# Altium PCB Modulo Servo.PcbDoc
Units mm, origin at the board's own origin, x right, y up, seen from the top; angles counter-clockwise.
Board outline 38 x 38 mm, 2 copper layers (Top Layer, Bottom Layer); 5 components, 10 nets, 25 pads, 0 vias.
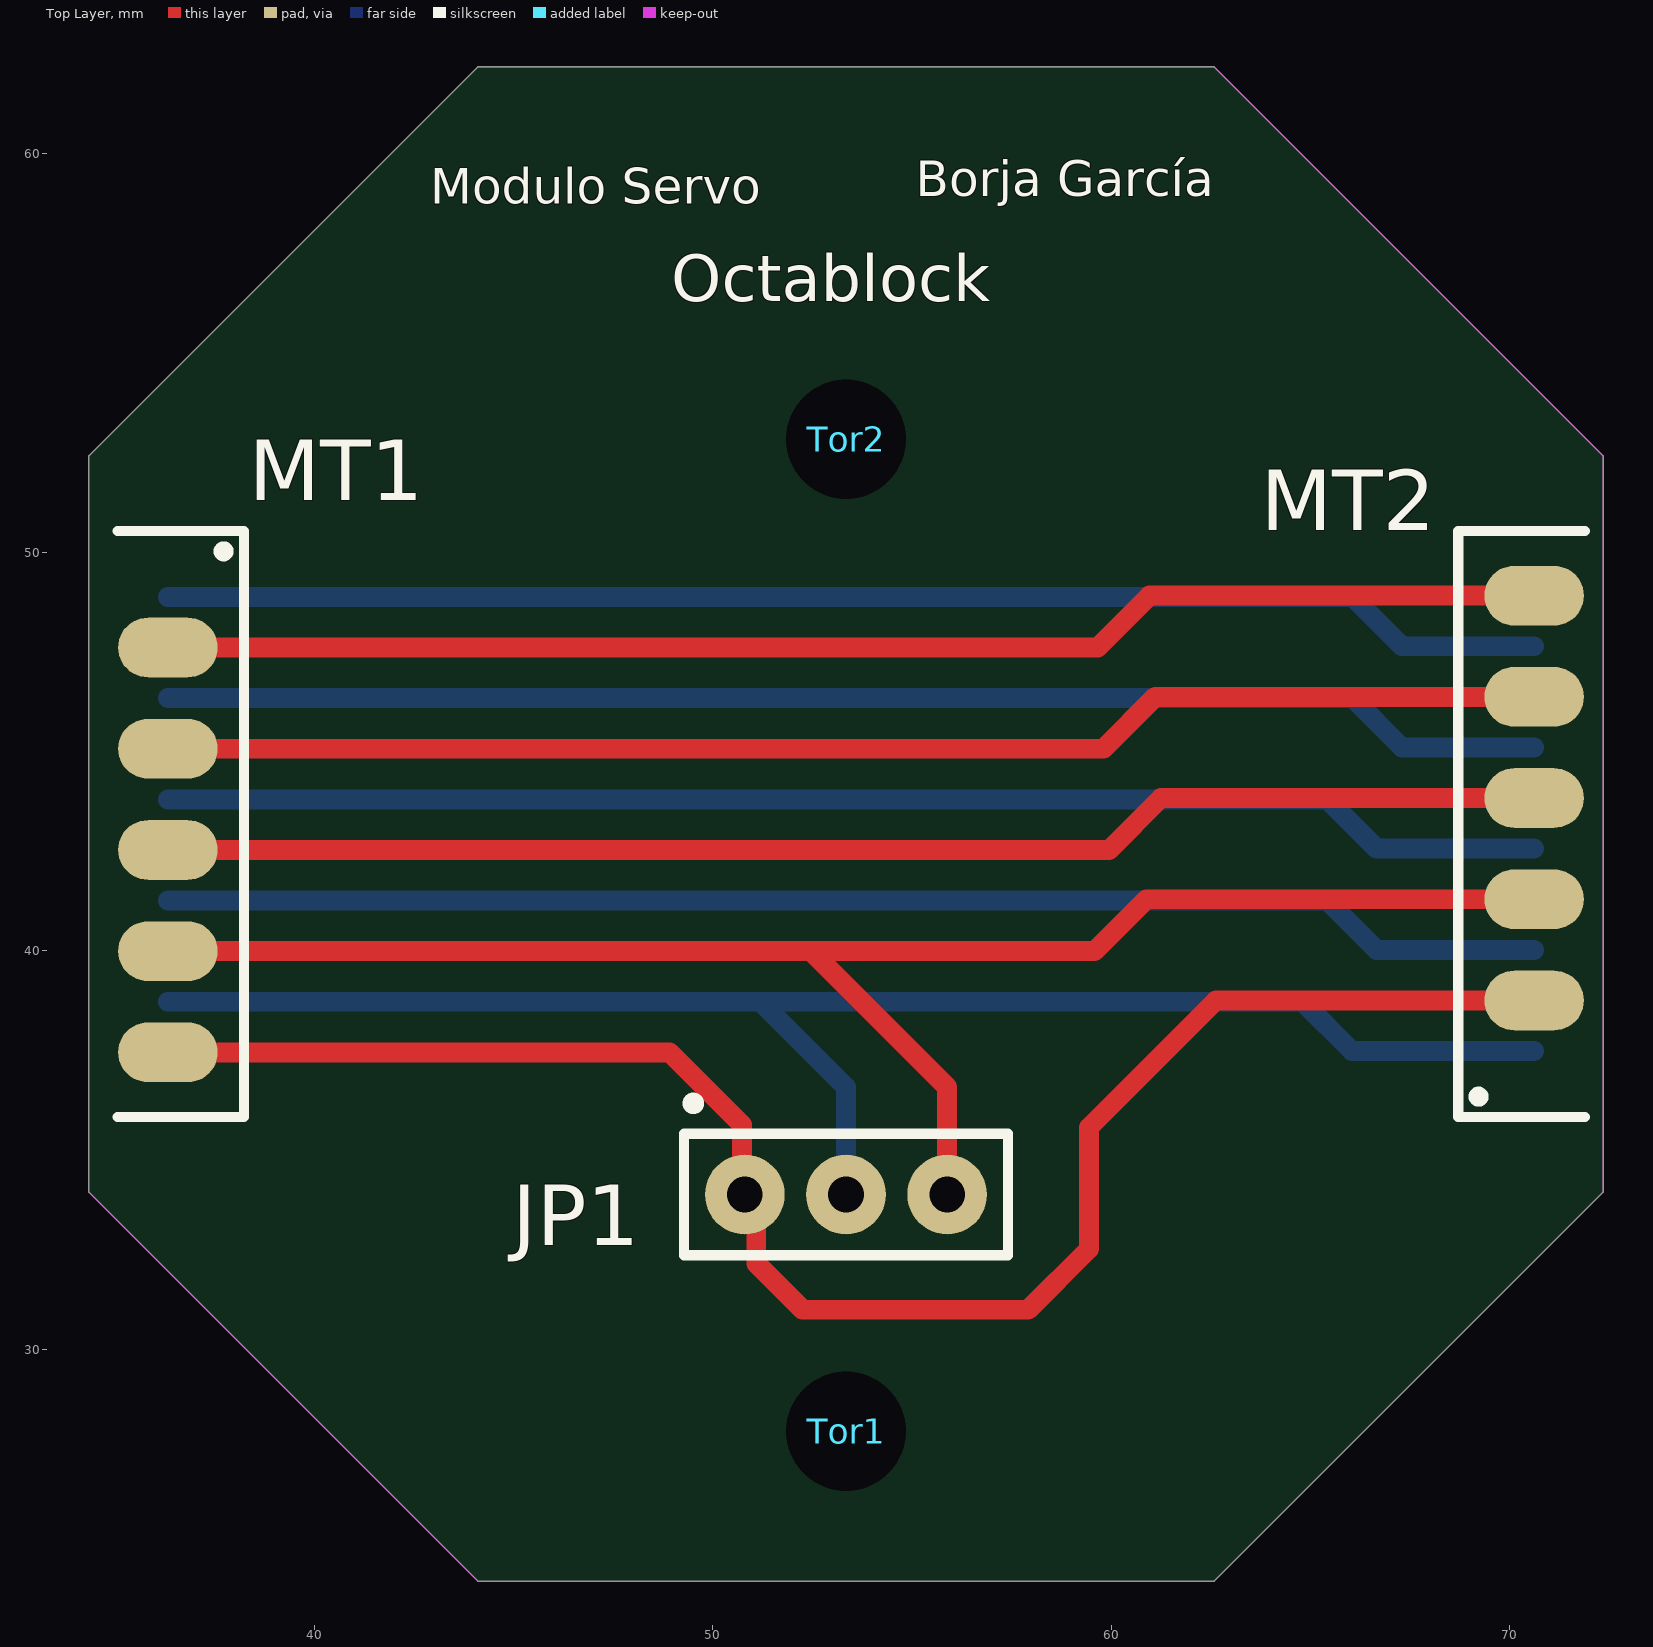
[diagram p0: Top Layer view]
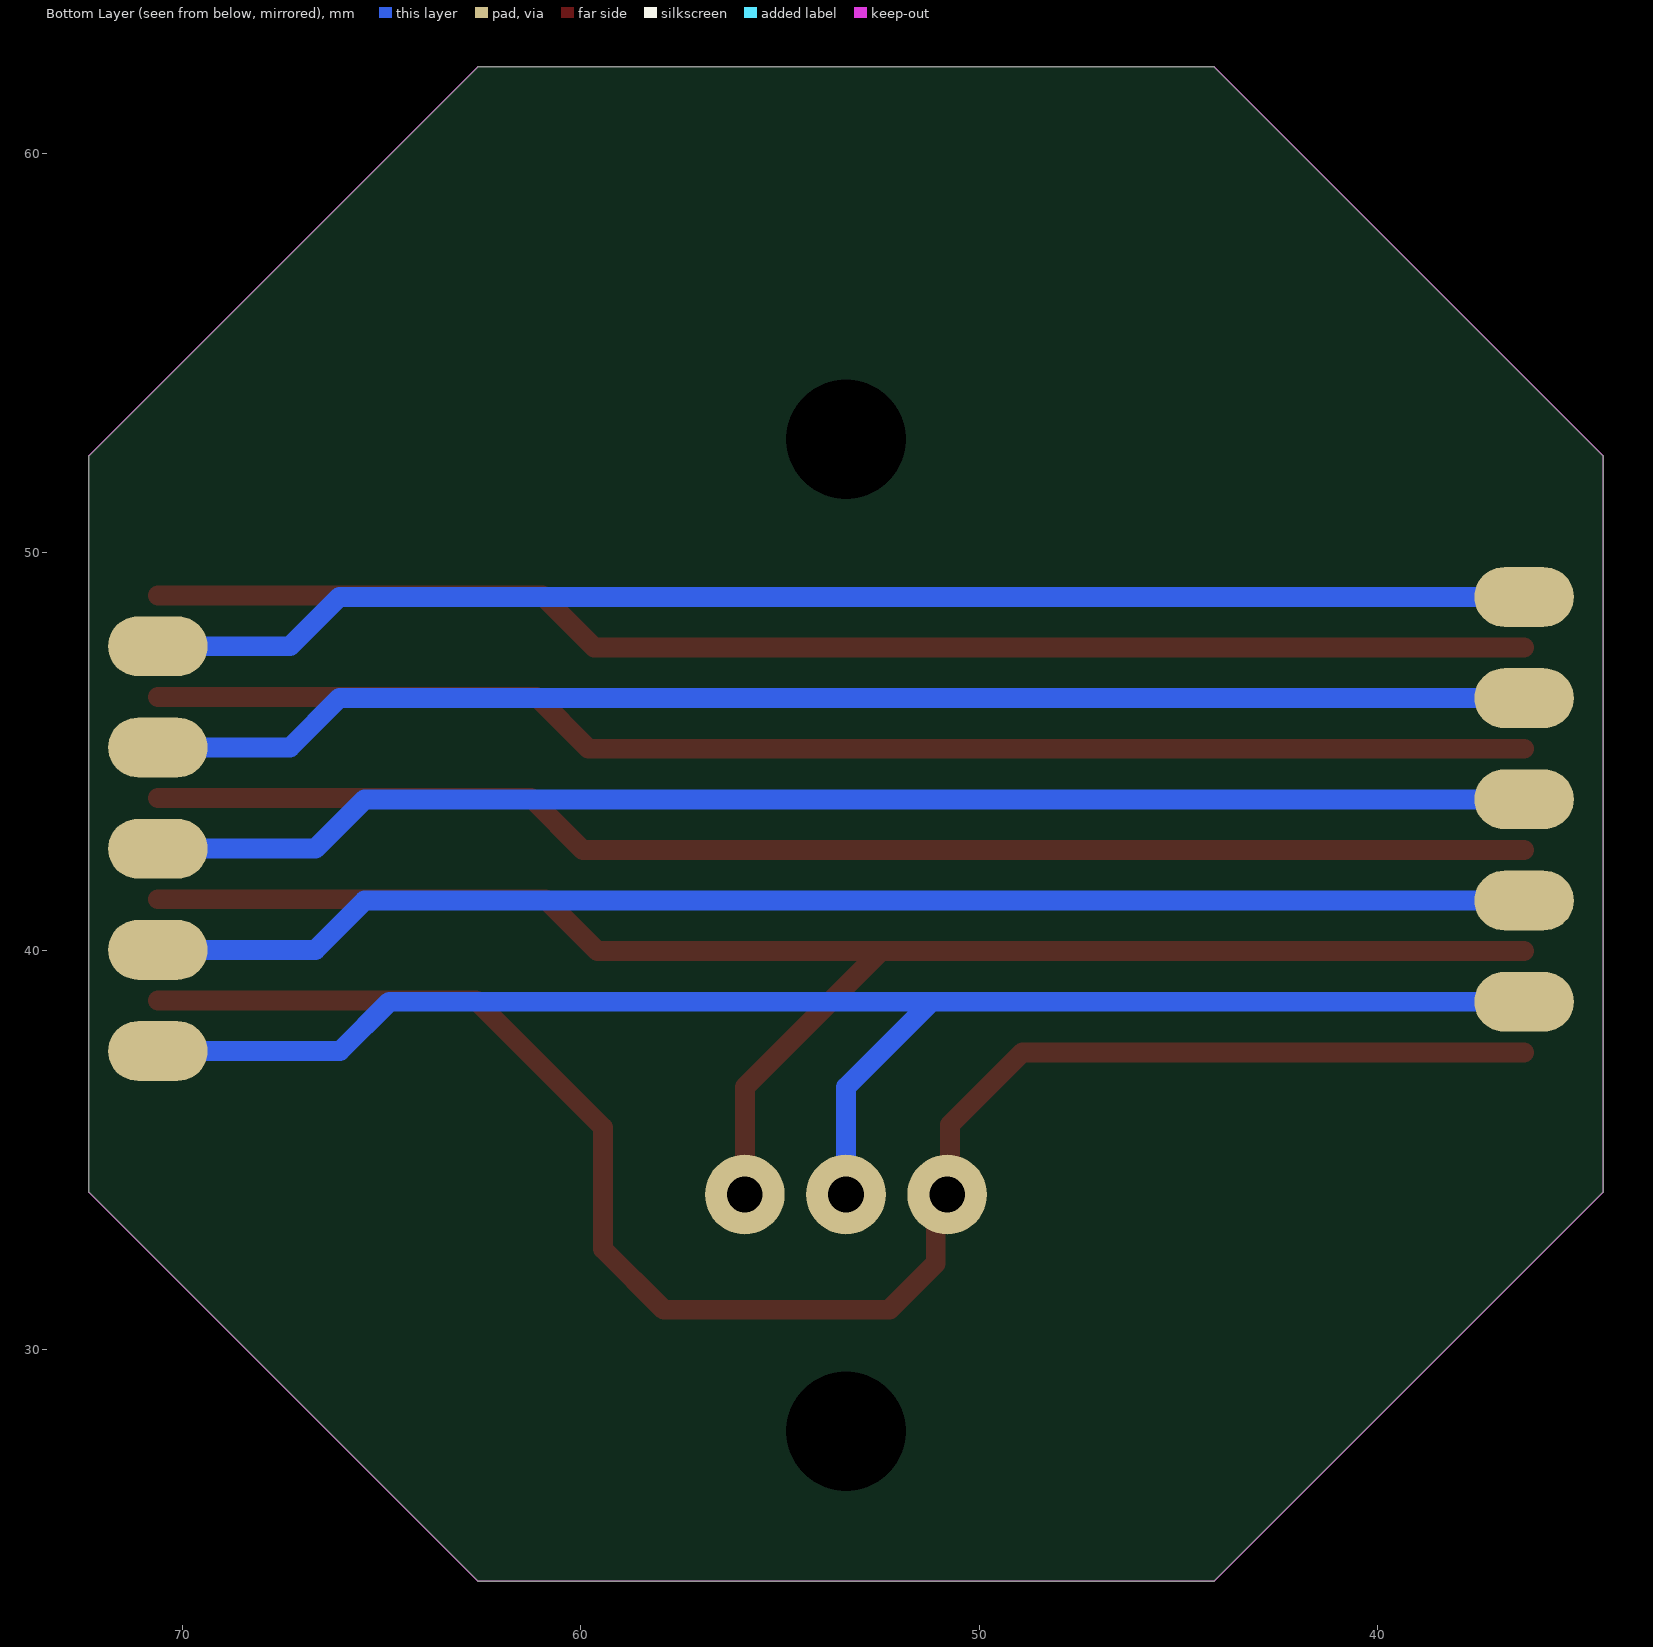
[diagram p1: Bottom Layer view, seen from below]
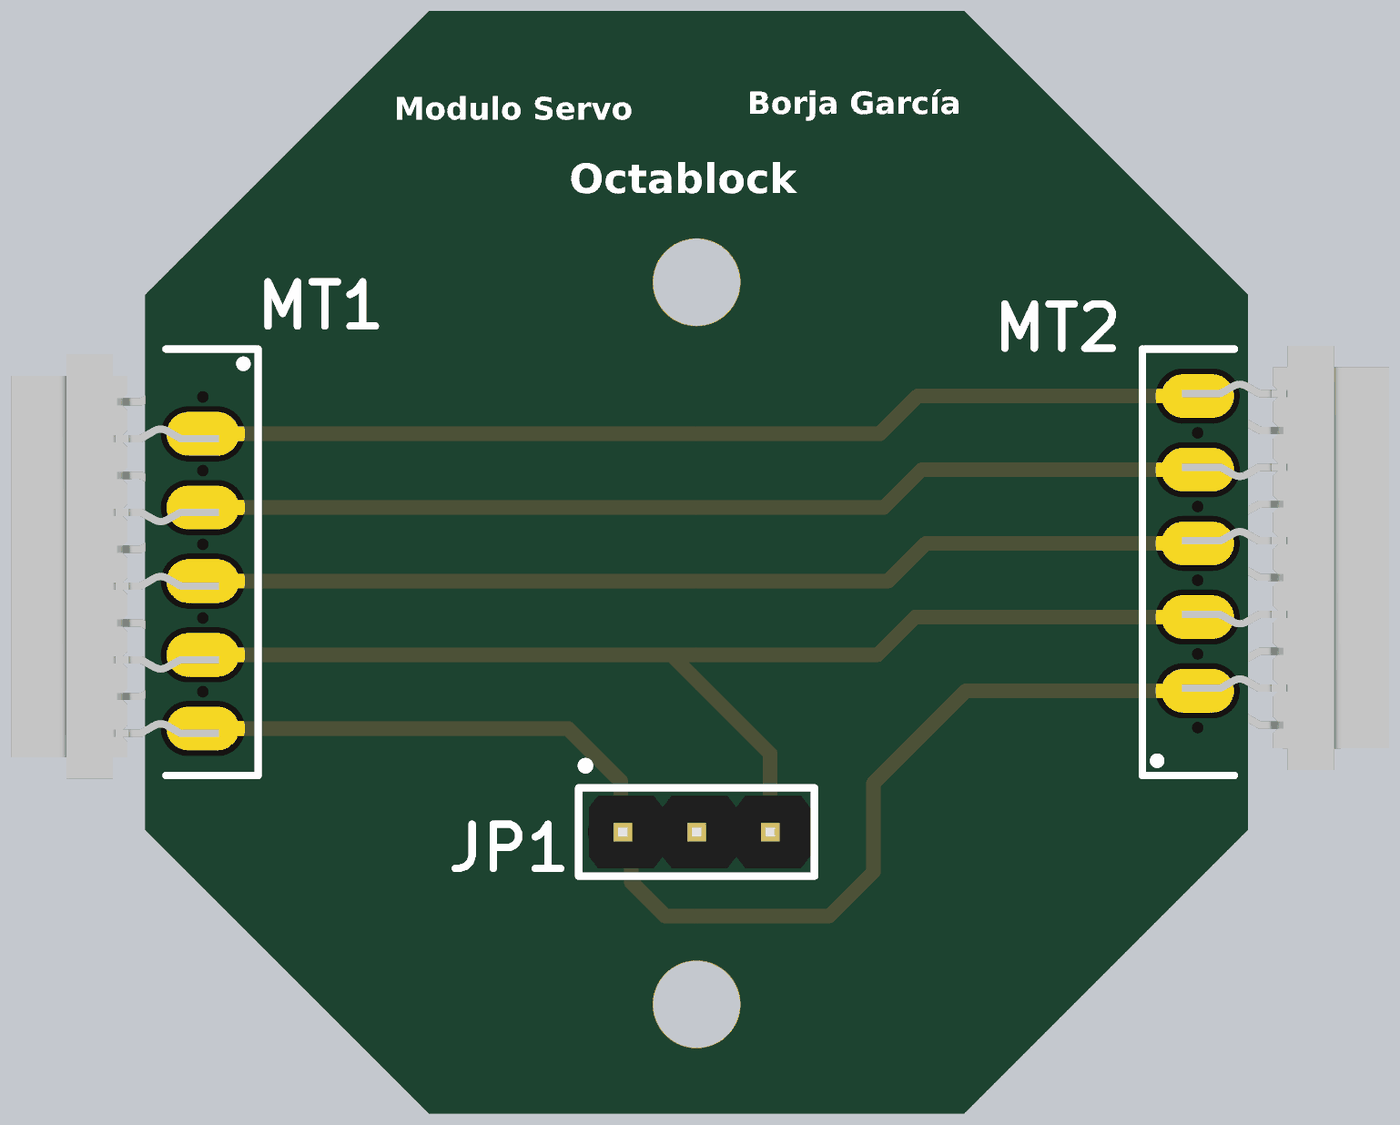
[diagram p2: 3D render of the assembled board from above, using the file's embedded part models]

## Layer stack, top to bottom
Top Solder: solder mask 0.0102, Solder Resist, Dk 3.5
Top Layer: signal copper 0.0356
Dielectric 1: dielectric 0.32, FR-4, Dk 4.8
Bottom Layer: signal copper 0.0356
Bottom Solder: solder mask 0.0102, Solder Resist, Dk 3.5

## Board outline
34.34,33.943 34.34,52.417 44.103,62.18 62.577,62.18 72.34,52.417 72.34,33.943 62.577,24.18 44.103,24.18

## Design rules (kind name [scope] priority, off if disabled: settings)
Clearance [All] p1: gap=0.254 ignorepadtopadclearanceinfootprint=FALSE except(0: Arc-Hole Track-Hole SMDPad-Hole THPad-Hole Via-Hole Fill-Hole Poly-Hole Region-Hole Text-Hole)
PolygonConnect [All] p1: connectstyle=Relief reliefconductorwidth=0.254 reliefentries=4 polygonreliefangle="90 Angle" airgapwidth=0.254
RoutingVias [All] p1: holewidth=0.711 width=1.27 viastyle="Through Hole" minholewidth=0.711 minwidth=1.27 maxholewidth=0.711 maxwidth=1.27
SolderMaskExpansion [All] p1: expansion=0.102 istentingtop=FALSE
Width [All] p1: maxlimit=1 minlimit=0.25 preferedwidth=0.5 minimp=50.000000 maximp=50.000000 favimp=50.000000
30 further rules are at their usual default settings.

## Components (designator, comment, footprint, x,y, rotation, side; value= is the part's Value field where it differs from the comment)
JP1 "Pines (3X2.54)" PIN(3X2.54MM) 50.8,33.881 r0 top
MT1 "MT" "MICRO-MATCH FAMALE 1.27MM/SMD" 36.322,48.879 r270 top
MT2 "MT" "MICRO-MATCH FAMALE 1.27MM/SMD" 70.612,37.481 r90 top
Tor1 "Tornillo3MM" Taladro_3mm 53.34,27.94 r90 top
Tor2 "Tornillo3MM" Taladro_3mm 53.34,52.832 r90 top

## Footprints (in the part's own frame and the unit in brackets; to place one, negate y for a bottom-side part, rotate by r counter-clockwise, add the part's x,y. Pads: shape width x height; smd on the part's side, far side on the other; paste and mask are expansions set on the pad)
"MICRO-MATCH FAMALE 1.27MM/SMD" [mm]
  round 0 / inner oval 1.5x2.5 / far side oval 1.5x2.5 all layers, no hole mask+0.2: 1(0,0) 3(2.54,0) 5(5.08,0) 7(7.62,0) 9(10.16,0)
  oval 1.5x2.5 / inner oval 1.5x2.5 / far side round 0 all layers, no hole mask+0.2: 2(1.27,0) 4(3.81,0) 6(6.35,0) 8(8.89,0) 10(11.43,0)
  silkscreen extent -1.65,-1.27 13.05,1.91, body extent -1.47,-6.6 13.16,0.55, height 2.6
PIN(3X2.54MM) [mm] "Tira de Pines Macho"
  round 2 hole 0.9 mask+0.2: 1(0,0) 2(2.54,0) 3(5.08,0)
  silkscreen extent -1.52,-1.52 6.6,2.31, body extent -1.17,-1.25 6.45,1.25, height 2.55
Taladro_3mm [mm]
  round 2.5 hole 3: 0(0,0)

## Part data
MT1 MT2: library part "Micro-MaTch Famale 1.27mm", "Micro-MaTch Famale 1.27mm T/Hole"
Tor1 Tor2: library part Taladro_3mm

## Nets (pads, with @x,y where several pads share a name; then routed paths per layer and width w, separated by ;. In a path a pad name is that pad's centre, name@x,y a point inside that pad or via, vN(x,y) a via of type N, cw(c..) or ccw(c..) an arc to the next point about the centre after c; other vN are vias at no path point)
NetJP1_1: JP1.1 MT1.10 MT2.2 | length 43.8
  Top Layer w0.5: MT1.10 48.911,37.449 50.729,35.631 50.729,33.952 JP1.1 51.087,33.594 51.087,32.154 52.253,30.988 57.912,30.988 59.436,32.512 59.436,35.56 62.627,38.751 MT2.2
NetJP1_2: JP1.2 MT1.9 MT2.1 | length 40.5
  Bottom Layer w0.5: MT1.9 51.197,38.719 ; JP1.2 53.34,36.576 51.197,38.719 ; MT2.1 66.04,37.481 64.802,38.719 51.197,38.719
NetJP1_3: JP1.3 MT1.8 MT2.4 | length 42.4
  Top Layer w0.5: MT1.8 52.467,39.989 ; JP1.3 55.88,36.576 52.467,39.989 ; MT2.4 60.881,41.291 59.579,39.989 52.467,39.989
NetMT1_1: MT1.1 MT2.9 | length 34.8
  Bottom Layer w0.5: MT1.1 66.056,48.879 67.294,47.641 MT2.9
NetMT1_2: MT1.2 MT2.10 | length 34.8
  Top Layer w0.5: MT1.2 59.658,47.609 60.96,48.911 MT2.10
NetMT1_3: MT1.3 MT2.7 | length 34.8
  Bottom Layer w0.5: MT1.3 66.056,46.339 67.294,45.101 MT2.7
NetMT1_4: MT1.4 MT2.8 | length 34.8
  Top Layer w0.5: MT1.4 59.801,45.069 61.103,46.371 MT2.8
NetMT1_5: MT1.5 MT2.5 | length 34.8
  Bottom Layer w0.5: MT1.5 65.421,43.799 66.659,42.561 MT2.5
NetMT1_6: MT1.6 MT2.6 | length 34.8
  Top Layer w0.5: MT1.6 59.944,42.529 61.246,43.831 MT2.6
NetMT1_7: MT1.7 MT2.3 | length 34.8
  Bottom Layer w0.5: MT1.7 65.421,41.259 66.659,40.021 MT2.3
pads on no net: Tor1.0 Tor2.0

## Keep-outs
Keep-Out Layer:
  the board outline again, w0.013

## Silkscreen, mask and mechanical layers (free items; w line width, h text height)
Top Overlay:
  text "Borja García" at 55.084,58.633 h1.52
  text "Modulo Servo" at 42.907,58.441 h1.52
  text "Octablock" at 48.95,55.908 h2
Autocad:
  lines w0.013: 34.34,43.18 72.34,43.18 ; 63.406,22.18 74.34,22.18 74.34,33.114 ; 63.406,22.18 74.34,33.114 ; 63.406,22.18 43.274,22.18 32.34,33.114 32.34,53.246 43.274,64.18 63.406,64.18 74.34,53.246 74.34,33.114 ; 28.34,35.18 32.34,35.18 32.34,51.18 28.34,51.18 28.34,35.18 ; 34.34,33.943 44.103,24.18 62.577,24.18 72.34,33.943 72.34,52.417 62.577,62.18 44.103,62.18 34.34,52.417 34.34,33.943 ; 74.34,35.18 78.34,35.18 78.34,51.18 74.34,51.18 74.34,35.18